# Altium PCB УШЯИ.411618.029Э.pcbdoc (part 4 of 6)
Units mil, origin at the board's own origin, x right, y up, seen from the top; angles counter-clockwise.
Board outline 13385.8 x 6692.9 mil, 4 copper layers (Top Layer, Supply, GND, Bottom Layer), stack 62.3 mil thick; 637 components, 474 nets, 1978 pads, 458 vias.
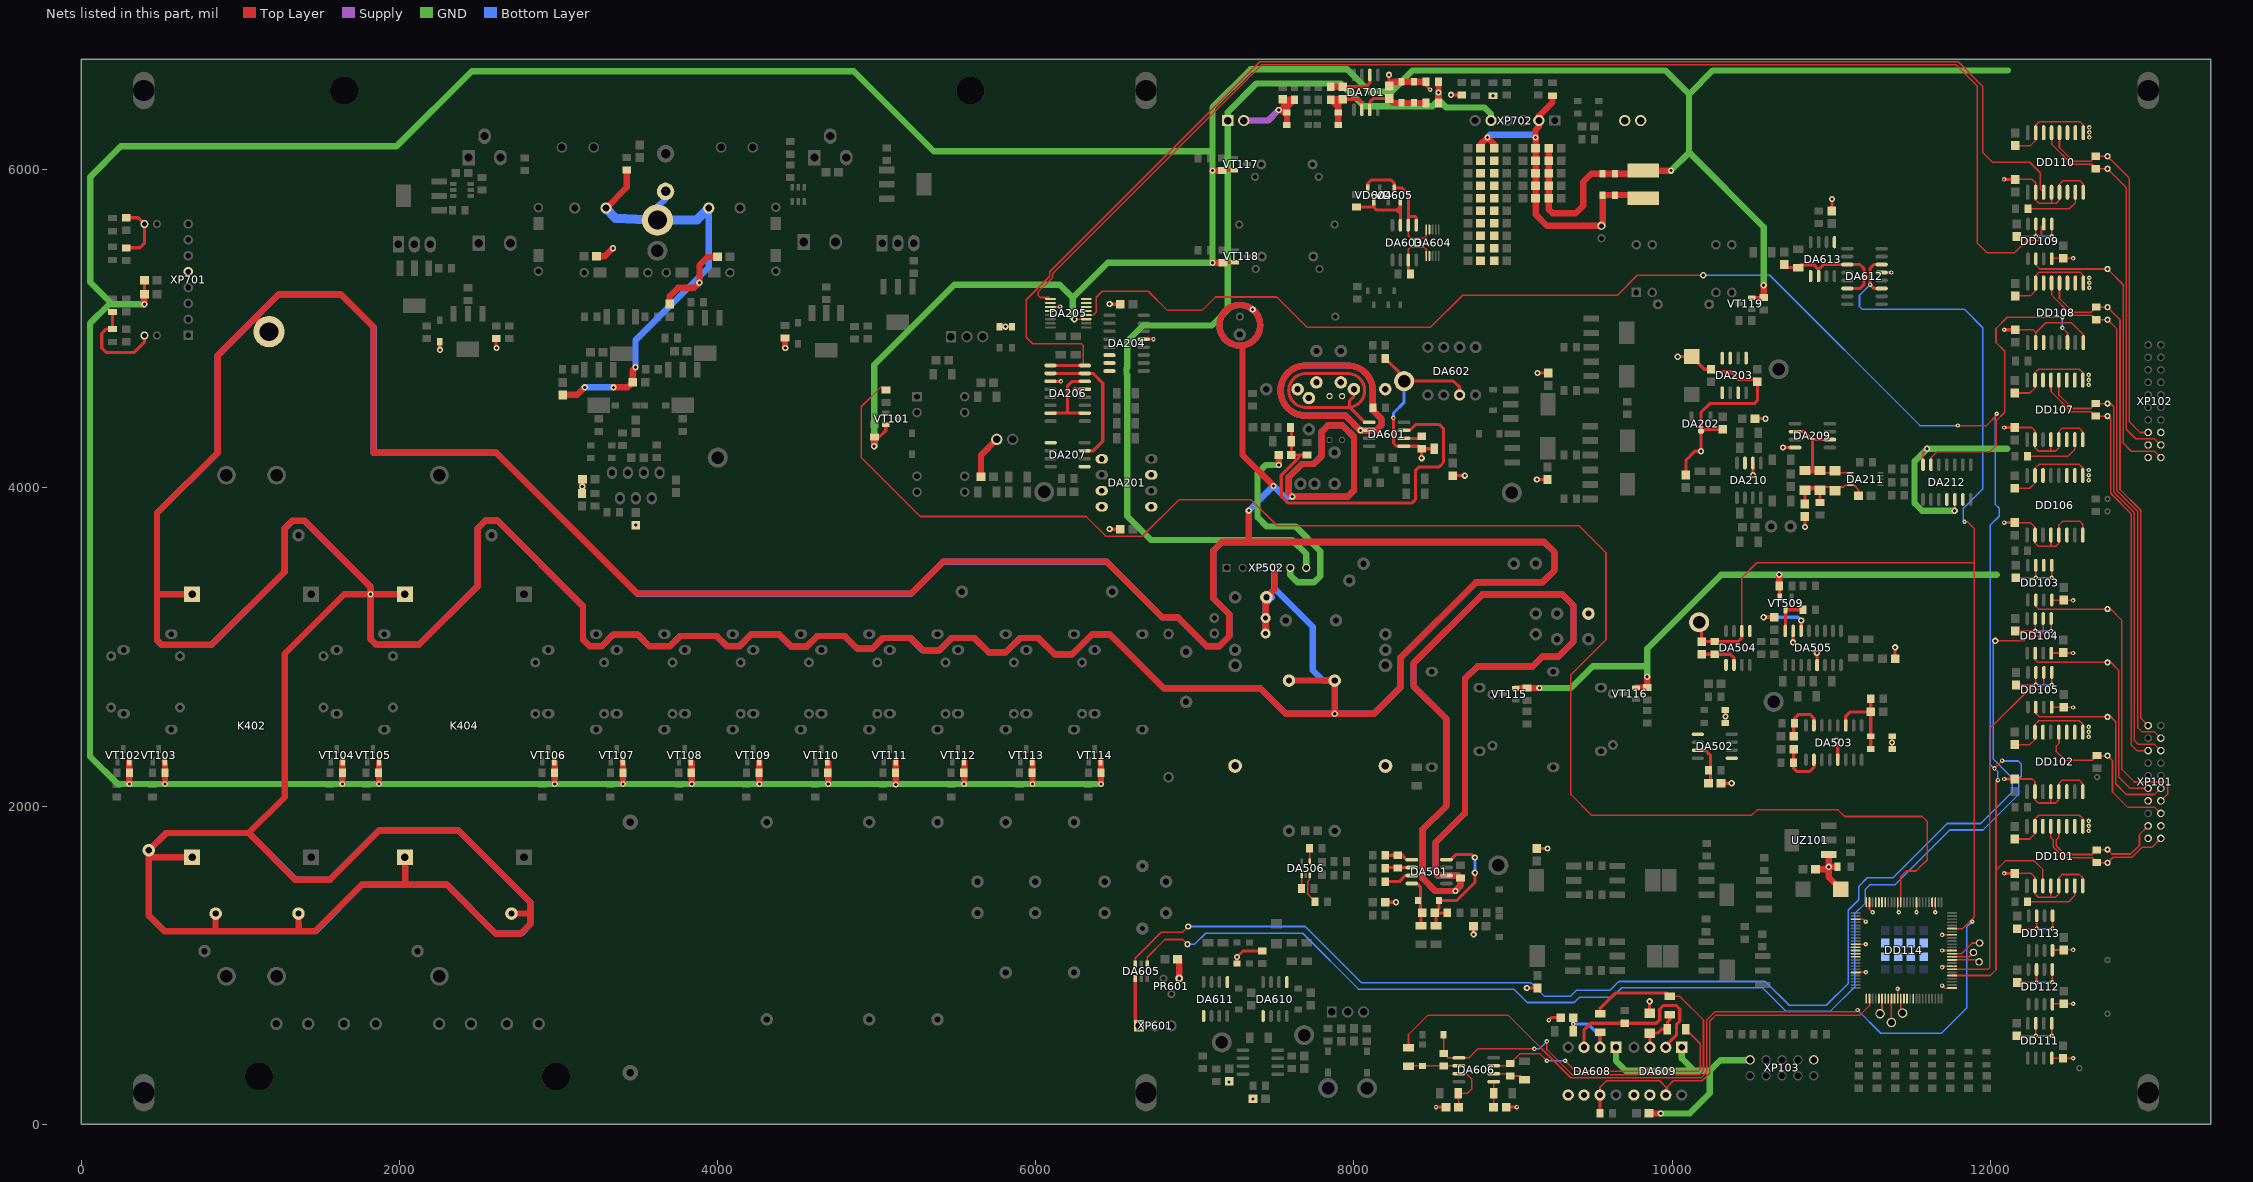
[diagram p6: the nets of this part, all layers, seen from the top]

## Via types
v1: diameter 27.6, hole 11.8, Top Layer to Bottom Layer, 218 vias
v2: diameter 39.4, hole 19.7, Top Layer to Bottom Layer, 213 vias
v3: diameter 27.6, hole 12, Top Layer to Bottom Layer, 24 vias
v4: diameter 78.7, hole 39.4, Top Layer to Bottom Layer, 3 vias

## Nets (pads, with @x,y where several pads share a name; then routed paths per layer and width w, separated by ;. In a path a pad name is that pad's centre, name@x,y a point inside that pad or via, vN(x,y) a via of type N, cw(c..) or ccw(c..) an arc to the next point about the centre after c; other vN are vias at no path point) (continued)
CLK1_DAC_P: DD102.12 pad.6@12736.2,2316.4 R103.1 XP101.6 | length 1084.7
  Top Layer w10: DD102.12@12431.1,2464 12431.1,2393.4 12415.2,2377.5 12415.2,2342 12470.2,2286.9 12640.7,2286.9 R103.1@12670.2,2316.4 ; R103.1@12670.3,2316.5 pad.6@12736.3,2316.5 ; pad.6@12736.2,2316.5 12767.7,2285 12767.7,2088.1 12862.2,1993.6 13031.5,1993.6 XP101.6@13070.8,1954.2
CLK_ADC_N: DD107.13 pad.13 R107.2 XP101.15 | length 2760.3
  Top Layer w10: DD107.13@12380.7,4676.7 12380.7,4606 12508,4478.7 12633,4478.7 R107.2@12661.5,4450.3 ; R107.2@12641.8,4450.3 R107.2@12661.5,4450.3 ; pad.13@12736.2,4450.3 12755.9,4430.6 12755.9,3966.1 12885.8,3836.1 12885.8,2383.4 12921.2,2348 XP101.15@12992.1,2347.9 ; pad.13@12736.3,4450.3 R107.2@12661.5,4450.3
CLK_ADC_P: DD107.12 pad.12 R107.1 XP101.16 | length 2837.8
  Top Layer w10: DD107.12@12430.7,4676.7 12430.7,4583.6 12515.8,4498.4 12630.3,4498.4 12661.5,4529 pad.12@12736.2,4529 12756,4529 ; pad.12@12755.9,4529 12775.6,4509.3 12775.6,3973.9 12905.5,3844 12905.5,2410.9 12929.1,2387.3 13031.5,2387.3 XP101.16@13070.9,2347.9
D: DA205.4 DA605.4 DD101.3 DD114.30 | length 18023.3
  Top Layer w10: DA205.4@6317.5,5085.4 6359.8,5085.4 6379.9,5105.5 6379.9,5198.4 6417.3,5235.8 6706.7,5235.8 6825.2,5117.3 7047.6,5117.3 7129.5,5199.2 7514.6,5199.2 7704.7,5009 8481.1,5009 8683.1,5211 9656.3,5211 9781.1,5335.8 v2(10195.6,5335.8) ; DA605.4@6700,1006.8 6700,1049.2 6811.8,1161 6924,1161 v2(6953.9,1131.1) ; DD114.30@11759.9,934.6 12000,934.6 12035.5,970 12035.5,1596 ; v1(11794.8,4391.4) 11975.6,4391.4 12039.7,4455.5 v1(12039.7,4465.8) ; v1(12025.7,2236.5) 12073.6,2284.5 v1(12073.6,2285.4) ; v1(12047.2,2162.6) 12035.5,2150.8 12035.5,1596 ; DD101.3@12330.2,1498.5 12330.2,1600.5 12275.7,1655 12094.5,1655 12035.5,1596
  Bottom Layer w10: v2(6953.9,1131.1) 6998.4,1131.1 7068.1,1200.8 7677.5,1200.8 8028.7,849.6 9004.3,849.6 9088.6,765.4 9383.8,765.4 9416.9,798.4 9623.2,798.4 9682.7,857.9 10567.3,857.9 10714.1,711.1 10995.3,711.1 11147.4,863.2 11147.4,1323.9 11214.4,1390.9 11214.4,1477.4 11241.4,1504.3 11399.6,1504.3 11744.5,1849.2 11953.9,1849.2 12177.1,2072.4 12177.1,2170.9 12194.1,2187.8 12194.1,2263.8 12174.8,2283.1 12076,2283.1 v1(12073.6,2285.4) ; v2(10195.6,5335.8) 10613,5335.8 11557.4,4391.4 v1(11794.8,4391.4) ; v1(12039.7,4465.8) 12031.5,4457.5 12031.5,3894.5 12055.1,3870.9 12055.1,3822 11999.4,3766.4 11999.4,2261 12023.9,2236.5 v1(12025.7,2236.5) 12047.2,2215 v1(12047.2,2162.6)
DA: DA212.6 DD108.6 | length 1887.5
  Top Layer w10: DA212.6@11626.5,4144.8 11626.5,4188.3 11664.7,4226.5 11997,4226.5 12035.4,4265 12035.4,4420.3 12090.9,4475.8 12090.9,4858.1 12035.4,4913.6 12035.4,5001.6 12106.1,5072.3 v1@12453.6,5072.3 ; v1@12452.4,5005 12484.5,4972.9 DD108.6@12484.5,4912.9
  Bottom Layer w10: v1(12452.3,5005) 12452.3,5071.2 v1(12453.5,5072.3)
DA201_1: DA201.1
DA201_3: DA201.3
DA201_5: DA201.5
DA201_7: DA201.7
DA201_8: DA201.8
DA203_1: DA203.1
DA203_3: DA203.3
DA203_5: DA203.5
DA203_7: DA203.7
DA203_8: DA203.8
DA204_14: DA204.14
DA204_15: DA204.15
DA204_16: DA204.16
DA205_5: DA205.5
DA205_6: DA205.6
DA205_7: DA205.7
DA205_8: DA205.8
DA205_10: DA205.10
DA205_12: DA205.12
DA206_10: DA206.7 DA206.10 DA207.3 | length 856.8
  Top Layer w19.7: DA206.10@6093.2,4719.3 DA206.7@6308.6,4719.3 ; DA207.3@6307.5,4233.4 6362.2,4233.4 6421.3,4292.6 6421.3,4657.4 6359.4,4719.3 DA206.7@6308.7,4719.3
DA206_15: DA206.2 DA206.6 DA206.15 | length 507.8
  Top Layer w19.7: DA206.15@6093.2,4469.3 6198.8,4469.3 ; DA206.2@6308.6,4469.3 6198.8,4469.3 ; DA206.6@6308.7,4669.3 6228.7,4669.3 6198.8,4639.3 6198.8,4469.3
DA207_1: DA207.1
DA207_5: DA207.5
DA210_7: DA210.7
DA211_1: C218.1 C219.1 C220.1 DA209.2 DA209.6 DA211.1 | length 811.2
  Top Layer w10: C218.1@10834.8,4109.4 10848.1,4096 C220.1@11004,4096 ; C220.1@11023.7,4107.5 11023.7,4094.8 DA211.1@11120.1,4094.8
  Top Layer w19.7: DA209.2@10772.8,4353.3 10831.9,4353.3 10881.9,4303.3 ; C218.1@10834.8,4109.4 10881.9,4109.4 ; C219.1@10929.2,4109.4 10881.9,4109.4 ; DA209.6@10991.1,4303.3 10881.9,4303.3 ; 10881.9,4109.4 10881.9,4303.3
DA212_11: DA212.11
DA212_13: DA212.13
DA501_1: DA501.1 P503.1 P504.1 | length 177.8
  Top Layer w19.7: P503.1@8196.9,1690.5 8275.6,1690.5 8303.2,1690.5 8330.5,1663.1 DA501.1@8363.3,1663.1
DA501_2: DA501.2 P501.1 P504.2 | length 171.7
  Top Layer w19.7: P501.1@8196.9,1607.8 8196.9,1613.1 DA501.2@8363.3,1613.1
DA501_3: DA501.3 P502.1 | length 182.1
  Top Layer w19.7: P502.1@8196.9,1525.1 8283.5,1525.1 8321.5,1563.1 DA501.3@8363.3,1563.1
DA501_4: C509.1 DA501.4 R510.2 VD503.2 | length 322.1
  Top Layer w19.7: DA501.4@8363.3,1513.1 8397.9,1513.1 8417.4,1493.6 8417.4,1328.3 8429.2,1328.3 8421.3,1320.4 R510.2@8421.3,1248.7
DA501_8: C509.2 DA501.8 R509.1 R511.2 VD503.1 | length 879.1
  Top Layer w19.7: R509.1@8515.8,1248.7 8515.8,1320.4 C509.2@8507.9,1328.3 ; DA501.8@8581.6,1663.1 8608.5,1663.1 8640.2,1694.8 8741.8,1694.8 v2@8759.9,1676.7 ; R511.2@8586.7,1328.3 C509.2@8507.9,1328.3 ; v2@8759.9,1581 8759.9,1519.6 8647.3,1407 8535.2,1407 8535.2,1355.5 C509.2@8507.9,1328.3
  Bottom Layer w19.7: v2(8759.8,1581) v2(8759.8,1676.7)
DA502_1: DA502.1
DA502_3: C513.1 DA502.3 R519.2 | length 273.4
  Top Layer w19.7: DA502.3@10161.2,2350.5 10209.8,2350.5 10240.2,2320.1 10240.2,2155 C513.1@10228.4,2143.2
DA502_5: DA502.5
DA503_2: C515.2 DA503.2 R521.1 | length 312.8
  Top Layer w19.7: C515.2@10763.8,2355.8 10763.8,2273.2 10763.8,2237.4 10783.5,2217.7 10866.2,2217.7 10890.8,2242.3 DA503.2@10890.8,2291.4
DA503_11: C514.2 DA503.11 R520.1 VD508.1 VD509.2 | length 541.2
  Top Layer w19.7: DA503.11@11090.8,2506.8 11090.8,2564.4 11118.4,2592 C514.2@11248.1,2592 ; VD509.2@11248.1,2359.8 11248.1,2438.5 C514.2@11248.1,2592 ; R520.1@11248.1,2674.7 C514.2@11248.1,2592
DA503_15: C516.2 DA503.15 R522.1 | length 300.8
  Top Layer w19.7: C516.2@10763.8,2438.5 10763.8,2517.3 R522.1@10767.7,2521.2 10767.7,2548.4 10795.3,2576 10866.2,2576 10890.8,2551.4 DA503.15@10890.8,2506.8
DA504_1: DA504.1
DA504_2: C518.2 DA504.2 R528.2 | length 257.2
  Top Layer w19.7: C518.2@10185.1,2954.2 R528.2@10267.7,2954.2 10365.9,2954.2 10388.4,2931.7 DA504.2@10388.4,2887.1
DA504_5: DA504.5
DA505_14: C519.2 DA505.14 | length 376.7
  Top Layer w19.7: v2(10574.8,3186.2) C519.2@10641.8,3186.5 ; DA505.14@10810.9,3101.3 v2@10811.1,3166.6
  Bottom Layer w19.7: v2(10574.8,3186.2) 10791.3,3186.2 v2(10811,3166.5)
DA505_16: DA505.16 R531.2 VT509.3 | length 243.5
  Top Layer w19.7: DA505.16@10710.9,3101.3 10712.6,3103.1 VT509.3@10712.6,3233.8 R531.2@10822.9,3233.8
DA506_1: DA506.1 P506.1 | length 84.7
  Top Layer w10: P506.1@7669.3,1481.8 7671.3,1481.8 DA506.1@7671.3,1564.5
DA506_3: DA506.3 P505.1 | length 190.6
  Top Layer w10: DA506.3@7722.5,1564.5 7722.5,1538.9 7708.7,1525.1 7708.7,1446.4 P505.1@7755.9,1399.1
DA506_4: DA506.4 P507.2 | length 68.9
  Top Layer w10: DA506.4@7722.5,1651.1 7722.5,1718 P507.2@7724.5,1718
DA601_1: DA601.1 DA602.3 KT601.1 R608.2 R609.2 R614.2 | length 1351.8
  Top Layer w19.7: R608.2@8196.9,4812.5 8315,4694.4 8315,4670.8 8626,4670.8 8664.2,4632.6 DA602.3@8664.2,4583.8 ; v1(8248.1,4439.8) 8248.1,4281.4 8267.5,4262 DA601.1@8313.9,4261.1 8409.7,4261.1 R609.2@8425.2,4245.6 ; v2(8425.2,4186.5) R609.2@8425.2,4245.6 ; R614.2@8504.8,4245.6 R609.2@8425.2,4245.6
  Bottom Layer w19.7: v1(8248.1,4439.8) 8248.1,4470 8315,4536.9 KT601.1@8315,4670.8
DA601_2: DA601.2 R609.1 | length 116.7
  Top Layer w19.7: DA601.2@8313.9,4311.1 8412.1,4311.2 R609.1@8425.2,4324.3
DA601_3: C603.1 DA601.3 R602.2 R603.2 R604.2 | length 2316.5
  Top Layer w19.7: R603.2@7602.4,4379.4 7606.3,4375.5 C603.1@7606.3,4206.2 7653.6,4206.2 ; R602.2@7704.8,4206.2 7653.6,4206.2 ; DA601.3@8313.9,4361.1 8351.8,4361.1 8389.8,4399.1 8535.5,4399.1 8563,4371.6 8563,4159 8535.5,4131.4 8409.5,4131.4 8385.9,4107.8 8385.9,3925.6 8364.2,3903.9 7587.4,3903.9 7543.3,3948 7543.3,4079.7 7653.6,4189.7 7653.6,4206.2
DA601_5: C601.1 C602.1 C604.1 C605.1 C606.2 DA601.5 R605.2 R606.2 | length 1440.5
  Top Layer w19.7: 8000,4576.3 7972.5,4548.7 7972.5,4506 7972.5,4505.4 8066.8,4411.1 DA601.5@8095.6,4411.1 ; 7696.8,4505.4 cw(c7696.8,4611.7) 7696.8,4718 7960.9,4718 cw(c7960.9,4611.7) 7972.38,4506.02 cw(c7960.9,4611.7) 7960.9,4505.4 7696.8,4505.4
DA603_1: DA603.1 DA603.2 DA604.10 VD604.3 VD605.1 | length 880.9
  Top Layer w10: DA603.2@8342,5650 8342,5582.8 8356.4,5568.4 8440.3,5568.4 8454.8,5582.9 DA604.10@8454.8,5624.5
  Top Layer w19.7: VD604.3@8086.7,5884.7 8086.7,5912.9 8108.3,5934.5 8234.3,5934.5 8254,5914.9 8254,5884.7 8303.8,5884.7 8342,5846.5 8342,5699.3 ; DA603.2@8342,5650 8342,5699.3 ; DA603.1@8392,5650 8392,5698.1 8383.9,5706.2 8348.9,5706.2 8342,5699.3
DA603_3: DA603.3 R620.2 VD604.1 VD605.3 | length 526.3
  Top Layer w19.7: R620.2@8016,5764.2 8124.1,5765.2 ; VD604.1@8124.1,5795.3 8124.1,5765.2 ; 8269.8,5745.5 8291.4,5767.2 VD605.3@8291.4,5795.3 ; VD605.3@8291.4,5795.4 DA603.3@8292,5650 ; 8291.6,5725.5 8289.7,5725.5 8269.7,5745.5 8143.8,5745.5 8124.1,5765.2
DA603_7: DA603.7 DA604.1 R622.2 | length 327.3
  Top Layer w10: DA603.7@8342,5431.7 8342,5498.9 8356.4,5513.3 8440.3,5513.3 8454.8,5498.8 DA604.1@8454.8,5457.2
  Top Layer w19.7: DA603.7@8342,5431.7 8342,5358.3 R622.2@8356.4,5344
DA604_2: DA604.2
DA604_9: DA604.9
DA605_1: DA605.1 XP601.1 | length 307.6
  Top Layer w19.7: DA605.1@6625.2,916.3 6625.2,643.4 XP601.1@6649.8,618.9
DA606_1: DA606.1 R628.2 R632.1 R633.1 VD609.2 | length 3043.7
  Top Layer w10: VD609.2@8563.8,563.1 8564.1,562.8 R628.2@8564.1,445 8591.5,417.6 DA606.1@8659.6,417.6 8723.5,417.6 8779.7,473.8 v1(9134.1,473.8) ; v1(9212.6,520.9) 9212.6,469.7 9370.1,312.2 10173.2,312.2 10196.8,335.8 10196.8,654.7 10046.5,805.1 R633.1@9984.5,805.1
  Top Layer w19.7: R632.1@9547.5,694.8 9547.5,729.8 9641.7,824 9965.5,824 R633.1@9984.5,805.1
  Bottom Layer w10: v1(9134.1,473.8) 9165.6,473.8 v1(9212.6,520.9)
DA606_2: DA606.2 R623.2 R628.1 VD608.2 | length 318.6
  Top Layer w10: R623.2@8342.5,364.2 8345.9,367.6 DA606.2@8659.7,367.6
DA606_3: C611.2 DA606.3 R624.2 | length 338.6
  Top Layer w10: C611.2@8657.5,107.5 8656.7,194.1 8712.6,194.1 8740.2,221.7 8740.2,284.6 8707.2,317.6 DA606.3@8659.7,317.6
DA606_5: C612.2 DA606.5 R626.2 | length 160.1
  Top Layer w10: C612.2@8878,107.5 DA606.5@8878,267.6
DA606_6: DA606.6 R625.2 R627.1 | length 209.3
  Top Layer w10: DA606.6@8878,317.6 8967,317.6 R627.1@8981.4,303.2 9049.2,303.2 R625.2@9072,280.5
DA606_7: DA606.7 R627.2 R634.1 | length 1677.9
  Top Layer w10: DA606.7@8878,367.6 8981.4,367.6 R627.2@8981.4,382 9041.5,442.1 9169.3,442.1 v1(9212.6,398.8) ; v1(9326.8,398.8) 9393.7,331.9 10161.4,331.9 10177.1,347.6 10177.1,506.1 R634.1@10086,597.2
  Bottom Layer w10: v1(9212.6,398.8) v1(9326.8,398.8)
DA608_2: C614.2 DA608.2 R631.2 R632.2 | length 452.4
  Top Layer w19.7: R631.2@9377.1,583.9 C614.2@9378,670.5 ; DA608.2@9546.3,483.5 9547.5,484.6 R632.2@9547.5,578.4
  Bottom Layer w19.7: v1@9378,631.1 9468.5,631.1 9546.3,553.3 DA608.2@9546.3,483.5
  other v1: 9377.9,631.1
DA608_3: DA608.3 DA609.2 R637.1 | length 1099.6
  Top Layer w19.7: DA608.3@9446.3,483.5 9446.3,593.1 9488.2,635 R637.1@9701,635 ; R637.1@9701,635.1 9900.3,635.1 9921.5,656.3 9921.5,723.3 9945.1,746.9 10023.8,746.9 10047.5,723.2 10047.5,648.5 10027.8,628.8 10027.8,561.8 9959.7,493.7 DA609.2@9959.7,483.5
DA608_5: DA608.5
DA608_6: DA608.6
DA609_3: C618.2 DA609.3 R633.2 R634.2 | length 308.1
  Top Layer w19.7: C618.2@9858.5,572.4 C618.2@9858.6,572.3 ; DA609.3@9859.7,483.5 9859.7,571.2 C618.2@9858.6,572.3 ; R634.2@9969.6,597.2 9933.3,597.2 9908.4,572.4 C618.2@9858.6,572.3 ; R634.2@9969.6,597.3 9969.6,641.4 9984.5,656.3 R633.2@9984.5,688.6
DA609_5: DA609.5
DA609_6: DA609.6
DA610_1: DA610.1
DA610_5: DA610.5
DA611_1: DA611.1
DA611_5: DA611.5
DA612_14: C629.2 DA612.11 DA612.14 DA613.6 R650.1 | length 807.4
  Top Layer w19.7: C629.2@10704.9,5403 10723.7,5384.1 R650.1@10791.5,5384.1 10809.1,5401.7 10889.8,5401.7 10919.9,5371.6 ; DA613.6@10919.9,5330.6 10919.9,5371.5 10951.7,5403.3 11100.9,5403.3 11180.9,5403.3 11204.8,5379.4 11204.8,5277.1 11181,5253.3 DA612.14@11101,5253.3
DA613_1: DA613.1
DA613_5: DA613.5
DA701_2: C738.1 DA701.2 R711.2 VD714.1 VD715.2 | length 568.7
  Top Layer w19.7: 7897.9,6418.6 7897.9,6438.5 ; C738.1@7929.2,6442.4 8031.6,6442.4 8049.9,6424.1 DA701.2@8049.9,6376.6
  Top Layer w39.4: 7901.6,6414.9 7897.9,6418.6 7878,6438.5 R711.2@7854.4,6438.5 ; VD715.2@7901.7,6281 7901.7,6391.3 ; R711.2@7854.4,6438.5 7858.4,6442.4 7929.2,6442.4 7901.7,6414.9 7901.7,6391.3 ; R711.2@7854.4,6438.5 7901.7,6391.3
DA701_3: C737.1 DA701.3 R710.1 VD712.2 VD713.1 | length 421.2
  Top Layer w19.7: DA701.3@8099.9,6376.5 8099.9,6424.2 8122,6446.3 C737.1@8220.6,6446.3
  Top Layer w39.4: C737.1@8220.6,6446.4 8248.1,6418.8 VD713.1@8299.2,6418.8 VD712.2@8377.9,6418.8 R710.1@8452.8,6418.8
DA701_6: C738.2 DA701.6 R712.2 | length 304.6
  Top Layer w19.7: C738.2@7929.2,6521.2 8074.9,6521.2 8099.9,6546.2 DA701.6@8099.9,6594.9
  Top Layer w39.4: R712.2@7854.4,6521.2 C738.2@7929.2,6521.2
DAT1_DAC_N: DD101.13 pad.4@12736.2,1643.2 R101.2 XP101.2 | length 917
  Top Layer w10: DD101.13@12380.3,1872.6 12380.3,1800.3 12394.6,1786 12394.6,1742.7 12461.6,1675.8 12639.9,1675.8 R101.2@12669.4,1646.3 ; R101.2@12669.4,1646.2 12672.3,1643.2 pad.4@12736.3,1643.2 ; pad.4@12736.2,1643.2 12771.6,1678.6 12889.7,1678.6 12952.7,1741.6 13015.7,1741.6 XP101.2@13070.9,1796.8
DAT1_DAC_P: DD101.12 pad.3@12736.2,1725.9 R101.1 XP101.3 | length 866.1
  Top Layer w10: DD101.12@12430.3,1872.6 12430.3,1801.9 12414.3,1786 12414.3,1750.5 12469.4,1695.5 12639.9,1695.5 R101.1@12669.4,1725 ; R101.1@12669.4,1724.9 12670.4,1725.9 pad.3@12736.3,1725.9 ; pad.3@12736.2,1725.9 12763.8,1698.3 12881.9,1698.3 12937,1753.4 12937,1820.4 XP101.3@12992.1,1875.5
DAT_ADC1_N: DD108.13 pad.14@12736.2,5056.6 R109.2 XP101.18 | length 3301.5
  Top Layer w10: DD108.13@12384.6,5283 12384.6,5212.3 12511.9,5085 12636.9,5085 12665.4,5056.6 pad.14@12736.3,5056.6 ; pad.14@12736.2,5056.6 12795.3,4997.5 12795.3,3981.8 12925.2,3851.9 12925.2,2493.6 12952.8,2466 13031.5,2466 XP101.18@13070.9,2426.7
DAT_ADC1_P: DD108.12 pad.14@12736.2,5135.3 R109.1 XP101.19 | length 3178.5
  Top Layer w10: DD108.12@12434.6,5283 12434.6,5189.9 12519.7,5104.7 12634.2,5104.7 12665.4,5135.3 pad.14@12736.3,5135.3 ; pad.14@12736.2,5135.3 12814.9,5056.5 12814.9,3989.7 12944.9,3859.7 12944.9,2552.7 XP101.19@12992.1,2505.4
DD101_6: DD101.6
DD101_7: DD101.7 R102.2 | length 374.9
  Top Layer w10: R102.2@12232.4,1399.2 12492.2,1399.2 12530.2,1437.2 DD101.7@12530.2,1498.6
DD101_10: DD101.10
DD101_11: DD101.11
DD101_14: DD101.14
DD102_6: DD102.6
DD102_10: DD102.10
DD102_11: DD102.11
DD102_14: DD102.14
DD106_6: DD106.6
DD106_10: DD106.10
DD106_11: DD106.11
DD106_14: DD106.14
DD107_6: DD107.6
DD107_7: DD107.7 R108.2 | length 377.7
  Top Layer w10: R108.2@12232.4,4198.3 12488.3,4198.3 12530.6,4240.7 DD107.7@12530.6,4302.6
DD107_10: DD107.10
DD107_11: DD107.11
DD107_14: DD107.14
DD108_3: DD108.3
DD108_10: DD108.10
DD108_11: DD108.11
DD108_14: DD108.14
DD110_6: DD110.6
DD110_7: DD110.7 R112.2 | length 380
  Top Layer w10: R112.2@12236.3,5753.5 12496.1,5753.5 12534.5,5791.9 DD110.7@12534.5,5857.8
DD110_10: DD110.10
DD110_11: DD110.11
DD110_14: DD110.14
DD114_1: DD114.1
DD114_5: DD114.5
DD114_6: DD114.6 pad.20 | length 99.4
  Top Layer w10: pad.20@11307.2,694.4 11319,706.2 DD114.6@11319,788.9
DD114_7: DD114.7
DD114_8: DD114.8
DD114_9: DD114.9 pad.21 | length 149.6
  Top Layer w10: pad.21@11378,639.3 DD114.9@11378,788.9
DD114_10: DD114.10
DD114_12: DD114.12 pad.24 | length 95.5
  Top Layer w10: DD114.12@11437.1,788.9 11437.1,710.2 pad.24@11448.9,698.3
DD114_13: DD114.13
DD114_14: DD114.14
DD114_16: DD114.16
DD114_35: DD114.35 pad.17 | length 174.2
  Top Layer w10: DD114.35@11759.9,1033 11917,1033 pad.17@11929.1,1020.9
DD114_36: DD114.36 pad.16 | length 145.1
  Top Layer w10: DD114.36@11759.9,1052.7 11866.5,1052.7 pad.16@11893.7,1079.9
DD114_37: DD114.37 pad.15 | length 200.8
  Top Layer w10: DD114.37@11759.9,1072.3 11819.1,1072.3 11885.8,1139 pad.15@11933.1,1139
DD114_54: DD114.54
DD114_69: DD114.69
DD114_70: DD114.70
DD114_71: DD114.71
DD114_72: DD114.72
DD114_75: DD114.75
DD114_87: DD114.87
DD114_88: DD114.88
DD114_89: DD114.89
DD114_90: DD114.90
DET: C518.1 DA504.6 DA612.3 DA612.6 DD114.45 KT503.1 R528.1 R623.1 | length 12384.7
  Top Layer w10: R623.1@8342.5,480.7 8342.5,564.2 8464.6,686.2 8968.5,686.2 9362.2,292.5 10181.1,292.5 10216.5,328 10216.5,654.7 10269.5,707.7 11155.4,707.7 v1@11165.4,717.7 ; DA504.6@10438.4,3100.1 10438.4,3435.6 10531.5,3528.7 11897.7,3528.7 ; DD114.45@11759.9,1229.8 11827.1,1229.8 11870.1,1272.8 ; v1(11837.4,3786.6) 11856.3,3786.6 11897.7,3745.3 11897.7,3528.7 ; 11870.1,1272.8 v1(11885.8,1272.8) 11885.8,1288.5 ; 11870.1,1272.8 11885.8,1288.5 ; 11885.8,1288.5 11897.7,1300.4 11897.7,3528.7
  Top Layer w19.7: KT503.1@10169.3,3155 10185.1,3139.3 10185.1,3033 R528.1@10267.7,3033 10413.7,3033 10438.4,3057.7 DA504.6@10438.4,3100.1 ; DA612.3@11316.4,5253.3 11267.9,5253.3 11244.1,5277.1 11244.1,5379.5 11267.9,5403.3 DA612.6@11316.4,5403.3
  Bottom Layer w10: v1@11165.4,717.7 11311,572 11692.9,572 11850.4,729.5 11850.4,1237.4 v1(11885.8,1272.8) ; v1(11244,5276.8) 11177.1,5209.9 11177.1,5139 11194.9,5121.2 11838.2,5121.2 11952.7,5006.7 11952.7,3993.3 11830.6,3871.3 11830.6,3786.6 v1@11837.3,3786.6
  other v1: 11165.3,717.7
DET1: DA608.7 DA609.7 DD114.2 R646.1 | length 2434.6
  Top Layer w10: DA608.7@9546.3,183.5 9546.3,232.5 9586.6,272.8 9921.2,272.8 9959.7,234.4 DA609.7@9959.7,183.5 9969.8,193.6 9969.8,234.7 10007.5,272.5 10188.6,272.5 10236.2,320.1 10236.2,646.8 10275.6,686.2 11181.1,686.2 11240.9,746 11240.9,788.2 DD114.2@11240.2,788.9
  Top Layer w19.7: DA608.7@9546.3,183.5 9546.3,69.3 R646.1@9547.5,68.1
E1: DD103.6
E2: DA605.6 DD104.6 | length 8201.8
  Top Layer w10: DA605.6@6625.2,1006.8 6625.2,1042.9 6789.4,1207.1 6922.4,1207.1 v2(6958.3,1242.9) ; v2(12030.3,3038.2) 12030.7,3037.8 12211.8,3037.8 12241.7,3067.7 12306.7,3067.7 12331.9,3093 DD104.6@12331.9,3178.4
  Bottom Layer w10: v2(6958.3,1242.9) 7694.1,1242.9 8046.5,890.5 9110.3,890.5 9197.2,803.5 9360.2,803.5 9398,841.3 9609,841.3 9664.9,897.2 10585.8,897.2 10735.4,747.6 10968.9,747.6 11105.9,884.6 11105.9,1344.9 11172.4,1411.4 11172.4,1494.5 11226.7,1548.8 11387.8,1548.8 11729.2,1890.2 11939.8,1890.2 12137.6,2088 12137.6,2175.7 12018.9,2294.5 12018.9,3026.8 v2(12030.3,3038.2)
ENB_D1BN: DD103.2 pad.7@12736.2,3237.7 XP101.8 | length 1999.4
  Top Layer w10: DD103.2@12285.9,3295.3 12285.9,3254.8 12303,3237.7 pad.7@12736.2,3237.7 12756,3237.7 ; pad.7@12755.9,3237.7 12826.7,3166.8 12826.7,2229.8 12905.5,2151.1 13094.5,2151.1 13114.2,2131.4 13114.2,2076.3 XP101.8@13070.9,2033
ENB_D2BN: DD104.2 pad.9@12736.2,2903 XP101.9 | length 1479.9
  Top Layer w10: DD104.2@12282,2961.5 12282,2917.7 12296.7,2903.1 12736.2,2903.1 12756,2903.1 ; 12755.9,2903.1 12807.1,2851.9 12807.1,2182.6 12877.9,2111.7 XP101.9@12992.1,2111.7
ENB_RGBN: DD105.2 pad.8 XP101.10 | length 1281.1
  Top Layer w10: DD105.2@12285.9,2622.9 12285.9,2582.7 12308.1,2560.6 12736.2,2560.6 12756,2560.6 ; 12755.9,2560.6 12787.4,2529.1 12787.4,2139.3 12854.3,2072.4 13030.9,2072.4 XP101.10@13070.9,2111.7
ER: DD105.6 DD114.32 | length 2272.8
  Top Layer w10: DD114.32@11759.9,973.9 11984.3,973.9 11996.2,985.7 11996.2,2486.7 12244.2,2734.8 12307.2,2734.8 12335.9,2763.5 DD105.6@12335.9,2839.8
GN: C218.2 C219.2 C220.2 C221.1 C222.2 DA211.5 R228.2 | length 657
  Top Layer w10: C218.2@10834.8,3984 10844.3,3993.6 10856.1,4005.4 11077.4,4005.4 11088.1,4016.1 11120.1,4016.1 11143.8,4016.1 11171.3,3988.5 C221.1@11171.3,3949.1
  Top Layer w19.7: C222.2@10834.8,3899.1 C218.2@10834.8,3984 ; C218.2@10834.8,3993.6 10844.3,3993.6 C219.2@10929.2,3993.6 ; R228.2@10929.2,3907 C219.2@10929.2,3984
GND: C102.1 C104.1 C106.1 C108.1 C110.1 C112.1 C114.1 C116.1 C118.1 C120.1 C122.1 C124.1 C126.1 C127.2 C128.1 C129.1 C130.1 C131.1 C132.1 C133.1 C134.1 C135.1 C136.1 C622.1 C703.1 C704.1 C706.1 C707.1 C708.1 C709.1 C710.1 DA205.3 DA212.7 DA212.12 DA608.1 DA609.1 DD101.2 DD101.4 DD101.5 DD101.8 DD102.2 DD102.4 DD102.5 DD102.8 DD103.5 DD103.7 DD104.5 DD104.7 DD105.5 DD105.7 DD106.2 DD106.4 DD106.5 DD106.8 DD107.2 DD107.4 DD107.5 DD107.8 DD108.2 DD108.8 DD109.5 DD109.7 DD110.2 DD110.4 DD110.5 DD110.8 DD111.5 DD111.7 DD112.5 DD112.7 DD113.5 DD113.7 DD114.11 DD114.26 DD114.33 DD114.38 DD114.43 DD114.53 DD114.59 DD114.65 DD114.74 DD114.78 DD114.86 DD114.95 L1.1 R127.1 R129.1 R131.1 R133.1 R135.1 R137.1 R139.1 R141.1 R143.1 R145.1 R147.1 R149.1 R151.1 R153.1 R155.1 R157.1 R159.1 R161.1 R163.1 R533.1 UZ101.1 VD101.2 VD710.1 VD711.2 VT101.2 VT102.2 VT103.2 VT104.2 VT105.2 VT106.2 VT107.2 VT108.2 VT109.2 VT110.2 VT111.2 VT112.2 VT113.2 VT114.2 VT115.2 VT116.2 VT117.2 VT118.2 VT119.2 VT509.2 XP103.2 XP103.10 | length 48640.7
  Top Layer w10: v2(6242.7,5059.8) DA205.3@6317.5,5059.8 ; DD114.95@11153.6,954.2 11216.6,954.2 v1@11216.6,954.3 ; DD114.86@11153.6,1131.4 v1@11216.6,1131.4 ; DD114.78@11153.6,1288.9 11200.8,1288.9 v1@11216.6,1273.1 ; DD114.74@11240.2,1395.2 11240.2,1351.9 v1@11259.9,1332.2 ; DD114.11@11417.4,788.9 v1@11417.4,851.9 ; DD114.65@11417.4,1395.2 11417.4,1340.1 v1@11425.3,1332.2 ; v1@11535.5,1332.2 DD114.59@11535.5,1395.2 ; DA212.7@11574.8,4146.8 11574.8,4217.7 v2(11602.3,4245.3) ; v1@11653.6,1332.2 DD114.53@11653.6,1395.2 ; v1@11696.9,871.6 11712.7,855.8 DD114.26@11759.9,855.8 ; v1@11696.9,985.8 11704.8,993.6 DD114.33@11759.9,993.6 ; v1@11696.9,1092 DD114.38@11759.9,1092 ; v1@11696.9,1190.5 DD114.43@11759.9,1190.5 ; v2(11775.6,3855.5) DA212.12@11775.6,3930.3 ; C102.1@12153.6,1576.3 12256,1576.3 12280.2,1552.1 12280.2,1498.6 12280.2,1448 12300.6,1427.5 12380.2,1427.5 ; C104.1@12153.6,2169.8 12263.9,2169.8 12280.2,2153.5 DD102.2@12280.2,2090.1 12280.2,2039.5 12300.6,2019 12410.4,2019 12430.2,2039.1 DD102.5@12430.2,2090.1 12430.2,2141.2 12450,2161.2 12559.8,2161.2 12580.3,2140.7 DD102.8@12580.3,2090.1 ; C112.1@12153.6,3781 12252,3781 12280.7,3752.4 12280.7,3703.3 12280.7,3652.7 12301.1,3632.2 12380.7,3632.2 ; C114.1@12153.6,4379.4 12259.9,4379.4 12280.6,4358.8 12280.6,4302.6 12280.6,4252 12301,4231.5 12380.6,4231.5 ; C108.1@12156.9,3100.8 v1@12281.9,3100.8 ; C116.1@12157.5,4993.6 12267.8,4993.6 12284.5,4976.9 12284.5,4974.9 ; C120.1@12157.5,5938.5 12263.9,5938.5 12284.5,5917.8 DD110.2@12284.5,5857.8 ; C110.1@12160.9,2761.4 12285.8,2761.4 12285.8,2783.1 ; C106.1@12160.9,3435.1 12285.9,3435.1 DD103.7@12285.9,3513.6 ; C122.1@12165.2,556.5 12285.9,556.5 DD111.7@12285.9,634.1 ; C118.1@12165.4,5580.2 12286.1,5580.2 DD109.7@12286.1,5657.9 ; C124.1@12169.1,891.1 12289.8,891.1 DD112.7@12289.8,968.7 ; C126.1@12170,1229.2 12290.7,1229.2 DD113.7@12290.7,1306.8 ; v1@12281.9,3100 v1@12281.9,3100.8 ; 12281.9,3128.4 12281.9,3126.3 ; DD104.7@12281.9,3178.5 12281.9,3126.3 ; v1(12282,3100.7) 12281.9,3126.3 ; v1@12282,3100.8 v1@12281.9,3100.8 ; DD110.2@12283.6,5859.8 12283.6,5809.2 12303.9,5788.7 12386,5788.7 ; DD108.2@12284.5,4912.9 12284.5,4974.9 ; v1@12285.9,2761.4 DD105.7@12285.9,2839.9 ; DD101.4@12380.2,1498.6 12380.2,1427.5 ; DD102.4@12380.2,2090.1 12380.3,2024.2 ; DD107.4@12380.6,4302.6 12380.6,4231.5 ; DD106.4@12380.7,3703.3 12380.7,3632.2 ; v1@12381.9,3100 DD104.5@12381.9,3178.5 ; DD110.4@12384.5,5857.8 12384.5,5790.1 12386,5788.7 ; v1@12385.9,556.7 DD111.5@12385.9,634.1 ; v1@12385.9,2761.4 DD105.5@12385.9,2839.9 ; v1@12385.9,3434.6 DD103.5@12385.9,3513.6 ; v1@12386.1,5580.5 DD109.5@12386.1,5657.9 ; v1@12389.8,891.3 DD112.5@12389.8,968.7 ; v1@12390.7,1229.4 DD113.5@12390.7,1306.8 ; DD110.5@12433.6,5859.8 12433.6,5808.8 12413.7,5788.7 12386,5788.7 ; DD110.5@12434.5,5857.8 12434.5,5908.8 12454.3,5928.9 12564.1,5928.9 12584.5,5908.4 DD110.8@12584.5,5857.8 ; DD101.8@12580.2,1498.6 12580.2,1549.2 12559.8,1569.7 12450,1569.7 12430.2,1549.6 12430.2,1498.6 12430.2,1447.6 12410.4,1427.5 12380.2,1427.5 ; DD107.8@12580.6,4302.6 12580.6,4353.2 12560.2,4373.7 12450.4,4373.7 12430.6,4353.6 12430.6,4302.6 12430.6,4251.6 12410.8,4231.5 12380.6,4231.5 ; DD106.8@12580.7,3703.3 12580.7,3771.3 12563.1,3788.9 12452.8,3788.9 12430.7,3766.7 12430.7,3703.3 12430.7,3652.3 12410.9,3632.2 12380.7,3632.2 ; DD108.8@12584.5,4912.9 12584.5,4963.5 12509.9,5038.1 12347.7,5038.1 12284.5,4974.9 ; v1@12281.9,3100.8 12281.9,3126.3
  Top Layer w19.7: C704.1@397.5,5217.2 C703.1@397.5,5303.8 ; R127.1@4986.3,4320.4 5017.8,4320.4 5057.1,4359.8 VT101.2@5057.1,4397.2 ; R159.1@7173.2,5993.6 7173.2,5995.6 VT117.2@7248.1,5995.6 ; R161.1@7177.2,5414.9 7179.1,5416.9 VT118.2@7252,5416.9 ; VT119.2@10500.4,5195 10502.4,5197 R163.1@10574.4,5197 ; R533.1@10673.3,3383.4 10675.2,3383.4 VT509.2@10675.2,3312.5 ; v1@12086.7,1576.3 C102.1@12153.6,1576.3 ; v1@12086.7,2169.8 C104.1@12153.6,2169.8 ; v1@12086.7,3781 C112.1@12153.6,3781 ; v1@12086.7,4379.4 C114.1@12153.6,4379.4 ; v1@12086.7,4993.6 C116.1@12157.5,4993.6 ; v1@12086.7,5938.5 C120.1@12157.5,5938.5
  Top Layer w39.4: VT102.2@303.1,2279.4 303.2,2279.3 303.2,2209.8 v2(303.2,2138.9) ; v2(397.2,5154) 397.5,5154.3 C704.1@397.5,5217.2 ; VT103.2@525.6,2279.4 527.6,2277.4 R131.1@527.6,2209.8 v2(527.6,2138.9) ; v2(1641.8,2138.9) 1641.8,2209.8 1641.8,2277.5 VT104.2@1643.7,2279.4 ; VT105.2@1872.1,2279.4 1872.9,2278.5 v2(1872.9,2139) ; VT106.2@2974,2279.4 2976.4,2277 R137.1@2976.4,2209.8 v2(2976.4,2138.9) ; VT107.2@3403.2,2279.4 3405.5,2277.1 R139.1@3405.5,2209.8 v2(3405.5,2138.9) ; VT108.2@3832.3,2279.4 3837.5,2274.2 v2(3837.5,2139) ; VT109.2@4261.4,2279.4 4262.7,2278.1 v2(4262.7,2139) ; VT110.2@4690.6,2279.4 4695.8,2274.2 v2(4695.8,2139) ; v2(4984.2,4261) 4986.2,4263 R127.1@4986.2,4320.5 ; v2(5119.7,2135.9) VT111.2@5119.7,2279.4 ; VT112.2@5548.8,2279.4 5550.1,2278.1 v2(5550.1,2139) ; VT113.2@5978,2279.4 5979.2,2278.1 v2(5979.2,2139) ; VT114.2@6407.1,2279.4 6409.5,2277 6409.5,2209.8 v2(6409.5,2138.9) ; v2(7110.2,5414.6) 7176.9,5414.6 R161.1@7177.2,5414.9 ; v2(7110.2,5993.3) 7172.9,5993.3 R159.1@7173.2,5993.6 ; VT115.2@9016.9,2739.3 9018.8,2741.3 R155.1@9087.7,2741.3 ; R155.1@9094.5,2741.3 v2(9165.3,2741.3) ; C706.1@9224.4,5820.4 9224.4,5749.5 9248.1,5725.9 9393.7,5725.9 9441,5773.2 9441,5922.8 9492.2,5973.9 VD710.1@9563,5973.9 VD711.2@9641.7,5973.9 L1.1@9818.9,5973.9 ; C706.1@9224.5,5820.4 9224.5,5899.1 9224.5,5977.8 9224.5,6056.6 C710.1@9224.5,6135.3 ; VT116.2@9772.8,2743.2 9774.7,2745.2 R157.1@9843.6,2745.2 ; L1.1@9818.9,5993.6 9991.8,5993.6 v2(9992.1,5993.3) ; R157.1@9842.5,2753.1 v2(9842.5,2812.2) ; C622.1@9858.2,68.1 v2(9928.5,68.1) ; R163.1@10574.8,5196.9 v2(10574.8,5272.8) ; R533.1@10673.3,3387.1 v2(10673.3,3454.3) ; C128.1@10900.4,1602.9 10969.6,1602.9 v2@10984.6,1617.9 ; UZ101.1@10984.6,1695.2 v2@10984.6,1617.9 ; VD101.2@11039.7,1617.9 v2@10984.6,1617.9 ; C127.2@11060,1477.9 10984.6,1553.3 v2@10984.6,1617.9
  GND w39.4: 185,5162.6 185,5163.9 56.9,5292 56.9,5953.4 249.8,6146.3 1982.1,6146.3 2454.6,6618.8 4856.1,6618.8 5360.1,6114.8 7109.2,6114.8 7110.2,6113.8 ; v2(397.2,5154) 176.5,5154 55.1,5032.7 55.1,2312.2 228.4,2138.9 v2(303.2,2138.9) v2(527.6,2138.9) v2(1641.8,2138.9) 1872.9,2138.9 v2(2976.4,2138.9) v2(3405.5,2138.9) 3837.5,2138.9 4262.7,2138.9 4695.8,2138.9 5550.1,2138.9 5979.2,2138.9 v2(6409.5,2138.9) ; v2(4984.2,4261) 4984.2,4772.8 5488.2,5276.8 6149.6,5276.8 6232.3,5194.1 ; v2(6242.7,5059.8) 6232.3,5070.3 6232.3,5194.1 ; v2(9165.3,2741.3) 9362.2,2741.3 9500,2879.1 9842.5,2879.1 ; DA608.1@9646.3,483.5 9646.3,398.2 9708.6,335.8 10137.8,335.8 ; v2(9842.5,2812.2) 9842.5,2879.1 ; v2(9928.5,68.1) 10110.2,68.1 10236.2,194.1 10236.2,335.8 ; v2(9992.1,5993.3) 10106.3,6107.5 ; DA609.1@10059.7,483.5 10059.7,413.9 10137.8,335.8 ; XP103.2@10490,404.8 10488.2,403 10303.4,403 10236.2,335.8 ; v2(10574.8,5272.8) 10574.8,5639 10106.3,6107.5 ; v2(11775.6,3855.5) 11570.8,3855.5 11523.6,3902.7 11523.6,4166.5 v2(11602.3,4245.3) 12106.3,4245.3 ; 12039.3,3454.3 v2(10673.3,3454.3) 10307.4,3454.3 9842.5,2989.4 9842.5,2879.1 ; 12110.2,6623.2 10255.9,6623.2 10106.3,6473.6 ; 6232.3,5194.1 6452.7,5414.6 v2(7110.2,5414.6) v2(7110.2,5993.3) 7110.2,6113.8 ; 7110.2,6113.8 7110.2,6390.9 7350.4,6631.1 7956.7,6631.1 8098.4,6489.4 8236.2,6489.4 8370.1,6623.2 9956.7,6623.2 10106.3,6473.6 ; 10106.3,6107.5 10106.3,6473.6 ; 10137.8,335.8 10236.2,335.8
  Bottom Layer w10: v1@12281.9,3099.9 v1(12381.9,3099.9) ; v1(12285.8,556.4) v1(12385.8,556.6) ; v1@12285.8,2761.3 v1(12385.8,2761.3) ; v1(12285.8,3434.5) v1(12385.8,3434.5) ; v1(12286,5580.3) v1(12386,5580.5) ; v1@12289.7,891 v1@12389.7,891.2 ; v1(12290.6,1229.2) v1(12390.6,1229.4)
  other v1: 11417.3,851.9 11696.8,871.6 12289.8,891 12389.8,891.2 11216.5,954.2 11696.8,985.7 11696.8,1092 11216.5,1131.4 11696.8,1190.5 11216.5,1273.1 11259.8,1332.2 11425.2,1332.2 11535.4,1332.2 11653.5,1332.2 12086.6,1576.3 12086.6,2169.8 12285.9,2761.3 12086.6,3781 12086.6,4379.4 12086.6,4993.6 12086.6,5938.5
  other v2: 10984.5,1617.9
GNDA: C201.2 C202.2 C203.2 C204.2 C205.2 C206.1 C209.1 C214.2 C215.2 C222.1 C301.1 C303.1 C304.1 C307.1 C308.2 C311.2 C315.2 C316.2 C317.1 C318.2 C503.2 C506.2 C508.2 C510.2 C511.1 C513.2 C517.1 C603.2 C606.1 C607.2 C609.2 C610.1 C611.1 C612.1 C613.2 C614.1 C615.2 C616.2 C618.1 C628.2 C701.2 C702.1 C711.1 C712.1 C713.1 C714.1 C715.1 C716.2 C717.1 C718.1 C719.1 C720.1 C721.1 C722.1 C723.1 C724.1 C725.1 C726.1 C727.1 C728.1 C729.1 C730.1 C731.1 C732.1 C733.1 C734.1 C735.1 C736.1 C737.2 C739.1 DA202.2 DA204.5 DA205.11 DA206.5 DA206.11 DA209.4 DA210.6 DA503.5 DA505.5 DA505.15 DA612.5 FV501.2 FV502.2 L1.2 pad.25 PR601.1 R312.1 R317.1 R325.2 R643.2 R703.1 R704.1 R707.1 R709.2 R713.1 VD201.1 VD202.2 VD305.1 VD310.2 VD506.2 VD507.1 VD508.2 VD509.1 VD611.2 VD701.2 VD702.2 VD705.2 VD706.2 VD710.2 VD711.1 VD712.1 VD713.2 VD716.2 VD717.1 XP202.2 XP501.1 XP501.2 XP502.5 XP503.2 XP701.5 XP702.2 | length 14326.3
  Top Layer w10: DA205.11@6091.9,5136.6 6153.6,5136.6 v1@6153.6,5139
  Top Layer w19.7: VD702.2@196.7,5105 VD701.2@196.7,4998.7 159,4998.7 130,4969.7 130,4879.1 157.5,4851.6 334.7,4851.6 397.5,4914.4 C701.2@397.5,4957.4 ; R703.1@283.3,5508.5 369.6,5508.5 397.5,5536.5 397.5,5658.2 358.1,5697.5 R704.1@283.3,5697.5 ; VD305.1@2254.1,4918.8 2254.1,4869.2 v2@2256,4867.3 ; R312.1@2608.4,4938.5 2608.4,4881 v2@2610.3,4879.2 ; VD202.2@5771.7,5013 5810.1,5013 VD201.1@5850.4,5013 ; DA206.11@6093.3,4669.3 v1@6157.6,4669.1 ; v1@6244.3,4617.9 6244.3,4619.3 DA206.5@6308.7,4619.3 ; v2@6464.6,3741.4 6466,3740 C201.2@6531.5,3740 ; v2(6464.6,5154.7) 6466,5153.4 C206.1@6531.5,5153.4 ; DA204.5@6678.6,4934.3 v1@6740.2,4934.3 ; VD611.2@7264.6,1010.1 v2(7264.6,1051.1) 7302.4,1088.9 R643.2@7424,1088.9 ; C739.1@7551.2,6442.4 7551.2,6398.8 7543.6,6391.3 ; C739.1@7551.3,6435.5 C739.1@7551.3,6442.4 ; 7578.7,6391.3 7543.6,6391.3 ; 7578.7,6408 7578.8,6412.3 7578.8,6414.9 7579.1,6438.5 7579.1,6442.4 ; 7578.8,6324 7527.6,6375.2 7543.6,6391.3 ; R713.1@7622.1,6442.4 R713.1@7626.1,6438.5 ; C503.2@8196.9,1395.2 v2(8263.8,1395.2) ; C737.2@8220.5,6525.1 v2(8220.5,6595.7) ; R709.2@8452.7,6552.6 8452.7,6528.8 v1(8478.9,6502.6) ; v1(8515.7,107.5) C611.1@8578.7,107.5 ; v2@8610.3,6469.7 R707.1@8677.2,6470 ; C610.1@8622.1,4076.3 v2@8696.9,4076.3 ; C511.1@8752,1245.6 8752,1193.6 v2(8752.3,1193.3) ; C612.1@8956.7,107.5 v1(9023.6,107.5) ; v2@9086.7,855.8 C510.2@9153.6,855.8 ; C508.2@9149.6,1733.8 v2@9216.6,1733.5 ; v2(9149.6,4052.7) C607.2@9216.6,4052.7 ; v2@9153.6,4722 C609.2@9220.5,4722 ; v1(9225.3,654.7) 9241,670.5 C614.1@9299.2,670.5 ; C618.1@9858.5,697.8 v2@9858.5,772.6 ; v2@10035.5,4824 10036.6,4825.2 10122.1,4825.2 10201.7,4745.6 C204.2@10244.1,4745.6 10244.1,4729.9 10366.2,4729.9 10413.5,4682.6 10535.6,4682.6 10535.6,4548.8 10515.8,4529.1 10236.2,4529.1 10181.1,4474 DA202.2@10181.1,4341.8 ; C215.2@10086.6,4080.2 10086.6,4174.4 10141.7,4229.5 v2(10181.1,4229.5) DA202.2@10181.1,4341.8 ; C513.2@10307.1,2143.2 v2(10374,2142.9) ; C202.2@10318.8,4367.6 10207,4367.6 DA202.2@10181.1,4341.8 ; VD507.1@10334.7,2521.2 10334.7,2562 VD506.2@10334.7,2603.9 ; DA210.6@10507.3,4155.9 v2(10507.9,4079.9) ; C214.2@10519.7,4434.6 v2@10586.6,4434.3 ; v2@10696.9,4253.2 DA209.4@10772.8,4253.3 ; v2@10759.9,3028.8 DA505.15@10760.9,3101.3 ; v2@10834.7,3753.2 C222.1@10834.7,3820.4 ; v2@10909.5,2961.8 10910.9,2961.8 DA505.5@10910.9,2885.9 ; C628.2@11004,5740.3 v2@11004,5815.1 ; v2(11031.5,2409.9) 11040.8,2400.6 DA503.5@11040.8,2291.4 ; DA612.5@11316.4,5353.3 v1@11378,5353.3 ; VD509.1@11381.9,2359.8 v2(11381.9,2398.8) VD508.2@11381.9,2438.5 ; C517.1@11401.6,2926.7 v2@11401.6,2997.3
  Top Layer w27.6: v2@7527.6,6375.2 VD717.1@7578.8,6375.2
  Top Layer w39.4: C308.2@3025.8,4584.2 3118.2,4584.2 v2(3165.4,4631.4) ; C301.1@3148.2,3963.8 3151.8,3967.4 C304.1@3151.8,4053.2 ; C315.2@3240.2,5455 3292.2,5455 v2@3342.6,5505.4 ; C316.2@3299.3,5758.2 3429.2,5888.1 R325.2@3429.2,5997.6 ; v2(3346.5,4631.4) 3435.2,4631.4 3466.7,4662.9 3466.7,4739.8 v2@3484.3,4757.4 ; C307.1@3698.3,5154.4 3698.3,5203.7 3752,5257.4 3854.4,5257.4 3885.9,5288.9 3885.9,5399.1 3937.8,5451.1 C318.2@4000.1,5451.1 ; R317.1@4424,4941.1 4424,4880.7 v2(4425.2,4879.4) ; C209.1@5655.6,4068.5 5655.6,4205.1 XP202.2@5755.2,4304.7 ; C613.2@6895.5,1036.2 6901.4,1030.3 PR601.1@6901.4,916.1 ; v2@7527.6,4143.2 C603.2@7527.6,4206.2 ; C739.1@7551.3,6442.4 C739.1@7555.2,6438.5 ; VD716.2@7578.8,6281 7578.8,6324 7578.8,6359.8 7578.8,6375.2 7578.8,6391.3 ; C737.2@8220.6,6525.1 8248.1,6552.7 8299.3,6552.7 8377.9,6552.7 R709.2@8452.7,6552.7 ; C736.1@8795.4,6135.3 8795.4,6159 v2@8834.6,6198.3 ; v2@8838.7,6202.3 8882,6159 C717.1@8882,6135.3 ; v2@9141.7,6202.2 9141.7,6249.5 9161.8,6269.6 XP702.2@9161.8,6308.6 ; v2@9141.8,6202.3 9141.8,6135.3 9141.8,6056.6 9141.8,5977.8 9141.8,5899.1 9141.8,5820.4 9141.8,5718 9212.6,5647.2 9555.2,5647.2 9563,5647.2 9563,5840.1 9641.7,5840.1 9818.9,5840.1 L1.2@9818.9,5820.4 ; XP702.2@9161.9,6308.6 9161.9,6336.5 9248.1,6422.7 VD705.2@9248.1,6464.1 ; C739.1@7555.2,6438.5 7578.8,6414.9 ; C739.1@7555.2,6438.5 7579.1,6438.5 7602.5,6438.5 ; 7578.8,6391.3 7626.1,6438.5 7602.5,6438.5 ; 7578.8,6391.3 7578.8,6412.3 7578.8,6414.9 ; 7578.8,6414.9 7602.5,6438.5
  Supply w39.4: XP503.2@7307.5,6308.7 7461,6308.7 v2(7527.5,6375.2)
  GND w39.4: v2(7527.5,4143.2) 7446.3,4143.2 7394.1,4090.9 7394.1,3813.8 7451.2,3756.7 7633.1,3756.7 7788.2,3601.5 7788.2,3445.3 7748.8,3405.9 7645.3,3405.9 7599.7,3451.5 7599.7,3497 XP502.5@7599.9,3497.1
  Bottom Layer w39.4: v2(3165.4,4631.4) v2@3346.4,4631.4 ; v2(3484.2,4757.4) 3484.2,4926.7 3944.8,5387.3 C317.1@3944.8,5758.1 ; pad.25@3622,5682.6 3622,5765.3 3673.2,5816.5 VD310.2@3673.2,5886.5 ; v2(8838.6,6202.3) 8855.2,6218.9 9125.1,6218.9 v2(9141.7,6202.3)
  Bottom Layer w59.1: C316.2@3299.2,5758.2 3358.9,5693.5 pad.25@3622,5682.6 3871.9,5684.2 3944.8,5758.1 C317.1@3944.9,5758.2
  other v1: 6244.1,4617.9 6157.5,4669.1 6740.1,4934.2 6153.5,5139 11377.9,5353.2
  other v2: 7364.5,159 7214.9,266.6 9858.5,772.5 9086.6,855.8 9216.5,1733.5 10334.6,2562 10909.4,2961.8 11401.6,2997.2 10759.8,3028.7 6464.6,3741.3 10834.6,3753.1 3486.3,3765.3 3149.6,4007.9 8696.8,4076.3 10696.8,4253.1 10586.6,4434.2 9153.5,4721.9 10035.4,4824 2255.9,4867.3 2610.2,4879.1 5810,5013 3885.8,5288.9 3342.5,5505.4 11003.9,5815.1 8874,6464.1 8610.2,6469.7
GNDN: C101.1 C103.1 C105.1 C107.1 C109.1 C111.1 C113.1 C115.1 C117.1 C119.1 C121.1 C123.1 C125.1 DD101.9 DD101.15 DD102.9 DD102.15 DD103.4 DD104.4 DD105.4 DD106.9 DD106.15 DD107.9 DD107.15 DD108.9 DD108.15 DD109.4 DD110.9 DD110.15 DD111.4 DD112.4 DD113.4 XP101.1 XP101.4 XP101.7 XP102.1 XP102.3 XP102.6 | length 4548.1
  Top Layer w10: C101.1@12153.6,1792.8 12248.1,1792.8 12280.2,1825 DD101.15@12280.2,1872.6 12280.2,1919.5 12303.2,1942.5 12559.1,1942.5 12580.2,1921.4 DD101.9@12580.2,1872.6 ; C103.1@12153.6,2386.3 12248.1,2386.3 12280.2,2418.5 12280.2,2513 12303.2,2536 12559.1,2536 12580.2,2514.9 DD102.9@12580.2,2466.1 ; C111.1@12153.6,3997.5 12248.1,3997.5 12280.2,4029.7 12280.2,4124.1 12303.2,4147.1 12559.1,4147.1 12580.2,4126.1 DD106.9@12580.2,4077.2 ; C113.1@12153.6,4596 12248.1,4596 12280.2,4628.1 12280.2,4722.6 12303.2,4745.6 12559.1,4745.6 12580.2,4724.5 DD107.9@12580.2,4675.7 ; C115.1@12157.5,5206.2 12252.1,5206.2 12284.2,5238.3 12284.2,5332.8 12307.2,5355.8 12563.1,5355.8 12584.2,5334.7 DD108.9@12584.2,5285.9 ; C119.1@12157.5,6151.1 12252,6151.1 12284.2,6183.2 DD110.15@12284.2,6230.8 ; DD110.15@12284.5,6231.8 12284.5,6278.7 12307.5,6301.7 12563.4,6301.7 12584.5,6280.6 DD110.9@12584.5,6231.8 ; DD104.4@12382,2960.2 12384,2962.1 v1@12519.8,2962.1 ; DD111.4@12385.9,415.8 12386.8,414.9 v1@12519.8,414.9 ; DD105.4@12385.9,2621.6 12387.9,2619.6 v1@12519.8,2619.6 ; DD103.4@12386,3295.2 12388.3,3292.8 v1@12519.8,3292.8 ; DD109.4@12386.1,5439.6 12389,5442.4 C117.1@12456.7,5442.4 v1@12519.8,5442.4 ; DD112.4@12389.8,754.4 12392.9,757.4 v1@12519.8,757.4 ; DD113.4@12390.7,1092.5 12393.5,1095.4 12461.4,1095.4 12462,1096 v1@12519.8,1096
  other v1: 12519.7,414.9 12519.7,757.4 12519.7,1096 12618.1,1844 12618.1,1875.5 12618.1,1907 12618.1,2434.5 12618.1,2466 12618.1,2497.5 12519.7,2619.6 12519.7,2962.1 12519.7,3292.8 12618.1,4048.7 12618.1,4080.2 12618.1,4111.7 12618.1,4647.1 12618.1,4678.6 12618.1,4710.1 12622,5257.4 12622,5288.9 12622,5320.4 12519.7,5442.4 12622,6202.3 12622,6233.8 12622,6265.3
GNDS: R709.1 R710.2 XP502.6 XP503.1 XP702.5 | length 6434.3
  Top Layer w39.4: R710.2@8531.6,6418.8 8531.6,6484.5 R709.1@8531.6,6552.7
  GND w39.4: XP502.6@7699.9,3497.1 7699.9,3584.7 7613,3671.6 6724.8,3671.6 6574.8,3821.7 6574.8,4710.1 6569.8,4715.1 6569.8,4751.8 6574.8,4756.8 6574.8,4921 6673.2,5019.5 7106.3,5019.5 7205.9,5119.1 7205.9,6360.2 7387,6541.3 7917.3,6541.3 7917.3,6540.5 8060.4,6397.4 8492.1,6397.4 8531.5,6436.8 8531.5,6438.2 ; v2(8531.5,6484.5) 8531.5,6438.2 ; XP702.5@8861.8,6308.6 8861.8,6348 8818.9,6390.9 8578.7,6390.9 8531.5,6438.2
GRD: C504.2 K402.7 K402.9 K402.11 K402.12 K404.7 K404.9 K404.11 pad.1@1181.1,4981.5 R506.2 R507.1 VD501.2 VD502.1 XP502.4 | length 74015
  Top Layer w39.4: v4(425.2,1721.6) 533.4,1829.9 1051.3,1829.9 ; K402.7@696.9,1678.3 425.2,1678.3 425.2,1312.2 523.6,1213.8 844.1,1213.8 ; K402.9@696.9,3331.9 476.4,3331.9 ; K402.12@845.9,1324 844.1,1322.2 844.1,1213.8 ; 858.3,4221.6 476.4,3839.7 476.4,3331.9 ; 858.3,4221.7 859.1,4222.5 859.1,4833.5 1094.8,5069.2 ; pad.1@1181.1,4981.5 1094.8,5067.8 1094.8,5069.2 ; K402.11@1366.2,1324 1367.1,1213.8 ; v2@1819,3331.2 1819,3048.4 1819.1,3048.3 ; 1851.7,3015.7 1819.1,3048.3 ; K404.7@2035.5,1678.3 2037.3,1676.5 2037.3,1505.1 ; K404.9@2035.5,3331.9 1819,3331.3 v2(1818.9,3331.3) ; 2610.2,4221.8 2585,4221.8 2584.2,4221 1838.2,4221 1838.2,5010 1631.2,5216.9 1242.5,5216.9 1094.8,5069.2 ; 2610.3,4221.6 3496.1,3335.8 5216.5,3335.8 5417.4,3536.6 6444.9,3536.6 6795.3,3186.2 6893.7,3186.2 7074.8,3005.1 7153.5,3005.1 7216.5,3068.1 7216.5,3206 7115.3,3307.2 7115.3,3604.6 7170.8,3660.2 7340.1,3660.2 ; K404.11@2704.8,1324 2822.9,1324.2 ; 7295.3,4890.9 7298.8,4887.4 7298.8,4207.1 v2(7494.1,4011.8) ; v2(7339.4,3856.7) 7339.4,3660.9 7340.1,3660.2 ; VD501.2@7444.9,3083.9 VD502.1@7444.9,3182.3 7444.9,3307.1 C504.2@7449.93,3312.1 7499.9,3362.1 XP502.4@7499.9,3497.1 ; 7570.7,2579.8 7411,2739.6 6805,2739.6 6464.8,3079.8 6354.6,3079.8 6228.6,2953.9 6118.4,2953.9 6016.1,3056.2 5901.8,3056.2 5811.3,2965.7 5705,2965.7 5614.5,3056.2 5472.7,3056.2 5394,2977.5 5291.6,2977.5 5212.8,3056.2 5039.6,3056.2 4972.7,2989.3 4878.1,2989.3 4799.4,3068 4626.2,3068 4559.3,3001.1 4464.7,3001.1 4386,3079.8 4212.8,3079.8 4138,3005 4059.3,3005 3996.3,3068 3764,3068 3701,3005 3571.1,3005 3500.2,3075.9 3342.7,3075.9 3271.9,3005 3197.1,3005 3153.8,3048.3 3153.8,3257 2618.3,3792.4 2539.6,3792.4 2492.4,3745.2 2492.4,3383 2122.3,3012.9 1854.6,3012.9 1819.1,3048.3 ; 7582.3,2579.8 v2(7879.5,2579.8) 8125.9,2579.8 8291.4,2745.3 8291.4,2930.3 8767.7,3406.6 9184.9,3406.6 9261,3482.6 9261,3595.7 9196.5,3660.2 7340.1,3660.2 ; R506.2@7591.6,2788.5 R507.1@7879,2788.5 v2@7879,2579.9 ; 476.4,3331.9 476.4,3044.5 507.9,3013 818.9,3013 1279.6,3473.7 1279.6,3745.3 1326.8,3792.5 1405.5,3792.5 1818.9,3379.1 v2(1818.9,3331.3) ; 844.1,1213.8 1367.1,1213.8 ; 1367.1,1213.8 1472.5,1213.8 1763.8,1505.1 2037.3,1505.1 ; v2(1818.9,3331.3) 1653,3331.3 1279.5,2957.9 1279.5,2056.2 1051.3,1827.9 1055.2,1827.9 1346.5,1536.6 1563,1536.6 1874,1847.6 2370.2,1847.6 2822.9,1394.9 2822.9,1324.2 ; 2037.3,1505.1 2299.2,1505.1 2606.3,1198 2763.8,1198 2822.9,1257.1 2822.9,1324.2 ; 7154.9,5021.6 7155.3,5011.6 7156.5,5001.6 7158.5,4991.8 7161.2,4982.1 7164.7,4972.7 7168.8,4963.6 7173.8,4954.8 7179.3,4946.5 7185.5,4938.6 7192.3,4931.3 7199.7,4924.4 7207.6,4918.2 7215.9,4912.7 7224.7,4907.8 7233.8,4903.6 7243.2,4900.1 7252.8,4897.4 7262.7,4895.4 7272.6,4894.2 7282.7,4893.8 7292.7,4894.2 7302.6,4895.4 7312.5,4897.4 7322.1,4900.1 7331.5,4903.6 7340.7,4907.8 7349.4,4912.7 7357.7,4918.2 7365.6,4924.4 7373,4931.3 7379.8,4938.6 7386,4946.5 7391.6,4954.8 7396.5,4963.6 7400.7,4972.7 7404.1,4982.1 7406.9,4991.8 7408.8,5001.6 7410,5011.6 7410.4,5021.6 7410,5031.6 7408.8,5041.6 7406.9,5051.4 7404.1,5061 7400.7,5070.5 7396.5,5079.6 7391.6,5088.3 7386,5096.7 7379.8,5104.5 7373,5111.9 7365.6,5118.7 7357.7,5124.9 7349.4,5130.5 7340.7,5135.4 7331.5,5139.6 7322.1,5143.1 7312.5,5145.8 7302.6,5147.7 7292.7,5148.9 7282.7,5149.3 7272.6,5148.9 7262.7,5147.7 7252.8,5145.8 7243.2,5143.1 7233.8,5139.6 7224.7,5135.4 7215.9,5130.5 7207.6,5124.9 7199.7,5118.7 7192.3,5111.9 7185.5,5104.5 7179.3,5096.7 7173.8,5088.3 7168.8,5079.6 7164.7,5070.5 7161.2,5061 7158.5,5051.4 7156.5,5041.6 7155.3,5031.6 7154.9,5021.6 ; 7589.6,3966.9 7589.6,4066.8 7672,4149.2 7746,4149.2 7797.1,4200.2 7797.1,4353 7838.2,4394.1 7926.2,4394.1 8000.8,4319.5 8000.8,3984.2 7961,3944.5 7612,3944.5 7589.6,3966.9
  Bottom Layer w39.4: 425.9,1678.7 425.9,1312.6 524.3,1214.2 1473.2,1214.2 1764.5,1505.5 2299.9,1505.5 2607,1198.4 2764.5,1198.4 2823.6,1257.5 2823.6,1395.3 2370.9,1848 1874.7,1848 1563.8,1537 1347.2,1537 1055.9,1828.3 ; v4@425.9,1722 534.2,1830.3 1055.9,1830.3 ; 1818.9,3048.4 1819,3048.3 1851.6,3015.7 ; 1818.9,3048.5 v2(1818.9,3331.3) 1818.9,3378.3 1405.5,3791.7 1326.8,3791.7 1279.6,3744.5 1279.6,3472.9 818.9,3012.2 507.9,3012.2 476.4,3043.7 476.4,3838.9 858.3,4220.8 858.3,4831.9 1242.9,5216.5 1631.1,5216.5 1839,5008.7 1839,4220.9 2610.2,4220.9 ; 1819,3048.4 1854.5,3013 2122.2,3013 2492.3,3383.1 2492.3,3745.3 2539.5,3792.5 2618.2,3792.5 3153.7,3257.1 3153.7,3048.4 3197,3005.1 3271.8,3005.1 3342.6,3076 3500.1,3076 3571,3005.1 3700.9,3005.1 3763.9,3068.1 3996.2,3068.1 4059.2,3005.1 4137.9,3005.1 4212.7,3079.9 4385.9,3079.9 4464.6,3001.2 4559.2,3001.2 4626.1,3068.1 4799.3,3068.1 4878,2989.4 4972.6,2989.4 5039.5,3056.3 5212.7,3056.3 5291.5,2977.6 5393.9,2977.6 5472.6,3056.3 5614.4,3056.3 5704.9,2965.8 5811.2,2965.8 5901.7,3056.3 6016,3056.3 6118.3,2954 6228.5,2954 6354.5,3079.9 6464.7,3079.9 6804.9,2739.6 7410.8,2739.6 7570.5,2579.9 ; 2610.3,4220.8 3496.1,3335 5216.5,3335 5417.4,3535.8 6444.9,3535.8 6795.3,3185.4 6893.7,3185.4 7074.8,3004.3 7153.5,3004.3 7216.4,3067.2 7216.4,3068 ; v2(7339.4,3856.7) 7339.4,3857.1 v2(7494.1,4011.8) 7561.4,3944.5 v2@7611.3,3944.5 ; VD501.2@7444.9,3083.9 VD502.1@7444.9,3182.3 7444.9,3272.9 C504.2@7484.2,3312.2 ; C504.2@7467.1,3329.3 7499.8,3362.1 XP502.4@7499.8,3497.2 ; XP502.4@7499.9,3497.2 7499.9,3367.7 7741.3,3126.4 7741.3,2854.5 ; 7582.2,2579.8 v2(7879.5,2579.8) ; 7741.3,2854.1 7807.3,2788.6 ; 7807.3,2788.5 R507.1@7879,2788.5 ; v2@7879.6,2579.9 8125.8,2579.7 8291.3,2745.2 8291.3,2930.2 8767.6,3406.5 9184.9,3406.5 9260.9,3482.5 ; 7216.4,3068 7216.4,3206 ; 7216.4,3068 7216.5,3068.1 7216.5,3205.9 7216.4,3206 ; 7216.4,3206 7115.3,3307.2 7115.3,3604.5 7169.3,3658.7 9196.4,3658.7 9261,3594.1 ; v2@7611.3,3944.5 v2(7612.1,3944.5) 7960.3,3944.5 8000.1,3984.2 8000.1,4319.5 7925.5,4394.1 7837.5,4394.1 7796.4,4353 7796.4,4200.2 7745.3,4149.2 7671.3,4149.2 7588.9,4066.8 7588.9,3966.9 v2@7611.3,3944.5 ; 9260.9,3482.5 9261,3482.6 9261,3540.8 9261,3594.1 ; 9260.9,3482.5 9260.9,3540.8 9261,3594.1 ; 7154.9,5021.6 7155.3,5011.6 7156.5,5001.6 7158.5,4991.8 7161.2,4982.1 7164.7,4972.7 7168.8,4963.6 7173.8,4954.8 7179.3,4946.5 7185.5,4938.6 7192.3,4931.3 7199.7,4924.4 7207.6,4918.2 7215.9,4912.7 7224.7,4907.8 7233.8,4903.6 7243.2,4900.1 7252.8,4897.4 7262.7,4895.4 7272.6,4894.2 7282.7,4893.8 7292.7,4894.2 7302.6,4895.4 7312.5,4897.4 7322.1,4900.1 7331.5,4903.6 7340.7,4907.8 7349.4,4912.7 7357.7,4918.2 7365.6,4924.4 7373,4931.3 7379.8,4938.6 7386,4946.5 7391.6,4954.8 7396.5,4963.6 7400.7,4972.7 7404.1,4982.1 7406.9,4991.8 7408.8,5001.6 7410,5011.6 7410.4,5021.6 7410,5031.6 7408.8,5041.6 7406.9,5051.4 7404.1,5061.1 7400.7,5070.5 7396.5,5079.6 7391.6,5088.3 7386,5096.7 7379.8,5104.5 7373,5111.9 7365.6,5118.7 7357.7,5124.9 7349.4,5130.5 7340.7,5135.4 7331.5,5139.6 7322.1,5143.1 7312.5,5145.8 7302.6,5147.7 7292.7,5148.9 7282.7,5149.3 7272.6,5148.9 7262.7,5147.7 7252.8,5145.8 7243.2,5143.1 7233.8,5139.6 7224.7,5135.4 7215.9,5130.5 7207.6,5124.9 7199.7,5118.7 7192.3,5111.9 7185.5,5104.5 7179.3,5096.7 7173.8,5088.3 7168.8,5079.6 7164.7,5070.5 7161.2,5061.1 7158.5,5051.4 7156.5,5041.6 7155.3,5031.6 7154.9,5021.6
  other v2: 7363.4,5121.2
GRD2: DA501.6 R508.1 | length 11041.8
  Top Layer w39.4: 8374,2754.1 8579.6,2548.6 8579.6,1999.9 8432.9,1853.3 8432.9,1545 8511.9,1466.1 8637.8,1466.1 8669.3,1497.6 R508.1@8669.3,1548.7 8654.9,1563.1 DA501.6@8581.6,1563.1 8525,1563.1 8511.9,1576.3 8511.9,1768.9 8697.3,1954.3 8697.3,2799.6 8776.7,2879 9123.2,2879 9182.2,2938.1 9283.2,2938.1 9379.1,3033.7 9379.1,3260.9 9308.2,3331.8 8808.2,3331.8 8374,2897.6 8374,2754.1
  Bottom Layer w39.4: 8374,2754.1 8579.6,2548.6 8579.6,1999.9 8432.9,1853.3 8432.9,1545 8511.9,1466.1 8637.8,1466.1 8669.2,1497.6 8669.2,1548.7 8654.8,1563.1 8525,1563.1 8511.9,1576.3 8511.9,1768.9 8697.3,1954.3 8697.3,2799.6 8776.7,2879 9123.2,2879 9182.2,2938.1 9283.3,2938.1 9379.1,3033.7 9379.1,3260.9 9308.2,3331.8 8808.2,3331.8 8374,2897.6 8374,2754.1
  other v2: 8637.7,1466.1
GRD3: DA601.6 R610.1 | length 3548.6
  Top Layer w39.4: 7683,4454.1 7684.7,4452.5 7948.5,4452.5 v2@8040.5,4360.4 ; 7683.15,4454.08 cw(c7696.6,4611) 7696.6,4768.5 7960.7,4768.5 cw(c7960.7,4611) 8118.2,4611 ; v2(8040.8,4361.1) DA601.6@8095.6,4361.1 8095.7,4361 8139.5,4361 8172.8,4394.3 8172.8,4433.1 8120.5,4485.5 R610.1@8120.5,4504.3 ; R610.1@8118.1,4504.3 8118.1,4611.9
  Bottom Layer w39.4: 7682.9,4454.1 7684.6,4452.4 7948.4,4452.4 v2@8040.4,4360.4 ; 7683.05,4454.08 cw(c7696.5,4611) 7696.5,4768.5 ; 7696.5,4768.4 7960.6,4768.4 ; 7960.6,4768.5 cw(c7960.6,4611) 8118.1,4611 ; v2@8040.7,4361 8095.5,4361 8095.6,4361 8139.5,4361 8172.8,4394.2 8172.8,4433.1 8120.4,4485.4 ; 8118,4485.4 8118,4611.9
IIS: DD114.64 R126.1 | length 10210.7
  Top Layer w10: R126.1@5059.1,4615.4 5043.3,4631.1 5024.8,4631.1 4902.8,4509 4902.8,4190.1 5273.3,3819.7 6316.5,3819.7 6441.3,3694.9 6669.4,3694.9 6900.1,3925.6 7352.7,3925.6 7517.3,3761.1 9414.5,3761.1 9583.8,3591.8 9583.8,3045.2 9363.4,2824.8 9363.4,2072.1 9492,1943.3 10500.4,1943.3 10532.7,1975.6 11042.9,1975.6 11084.3,1934.2 11570.8,1934.2 11602.7,1902.4 11602.7,1663 11531.3,1591.5 11471.2,1591.5 11436.7,1557 DD114.64@11436.7,1395.2
IMPB+/-VN: DD109.2 pad.4@12736.2,5375.5 XP102.2 | length 1910
  Top Layer w10: DD109.2@12286.1,5440.9 12286.1,5400.5 12311.1,5375.5 pad.4@12736.3,5375.5 ; pad.4@12736.2,5375.5 12834.6,5277.1 12834.6,4281 12885.8,4229.8 13031.5,4229.8 XP102.2@13070.9,4190.5
IMPB_N: DD110.13 pad.3@12736.2,6005.4 R111.2 XP102.4 | length 2434.7
  Top Layer w10: DD110.13@12384.6,6231.8 12384.6,6161.1 12511.9,6033.8 12636.9,6033.8 R111.2@12665.4,6005.4 ; R111.2@12661.5,6005.4 R111.2@12665.4,6005.4 ; XP102.4@13070.9,4269.2 13031.5,4308.6 12913.4,4308.6 12854.3,4367.6 12854.3,5887.3 pad.3@12736.2,6005.4 R111.2@12665.4,6005.4
IMPB_P: DD110.12 pad.5@12736.2,6084.1 R111.1 XP102.5 | length 2318.7
  Top Layer w10: DD110.12@12434.6,6231.9 12434.6,6138.8 12519.7,6053.6 12634.2,6053.6 R111.1@12665.4,6084.2 ; R111.1@12661.5,6084.2 R111.1@12665.4,6084.2 ; pad.5@12736.2,6084.1 12874,5946.3 12874,4414.9 12940.9,4347.9 XP102.5@12992.1,4347.9 ; pad.5@12736.3,6084.2 R111.1@12665.4,6084.2
IMPI: DA206.8 DA206.9 DD110.3 | length 8631.5
  Top Layer w10: DA206.8@6308.4,4769.3 6297.6,4780.1 6297.6,4895.1 6287.6,4905.1 5981,4905.1 5940.5,4945.6 5940.5,5181.6 6088.3,5329.3 6088.3,5336.3 6088.5,5336.5 6088.5,5357.4 7408.3,6677.2 11797.7,6677.2 11951.1,6523.8 11951.1,6108.8 12013,6046.8 12247.2,6046.8 12313.6,5980.5 12313.6,5878.6 DD110.3@12334.4,5857.8
  Top Layer w19.7: DA206.9@6093.1,4769.3 DA206.8@6308.4,4769.3
IMPV: DA205.9 DD109.6 | length 8220.3
  Top Layer w10: DA205.9@6091.9,5187.8 6083.6,5196 6028.7,5196 6014.6,5210.2 6014.6,5230.4 6106.1,5321.9 6106.1,5328.9 6106.3,5329.1 6106.3,5347.3 7416.9,6657.9 11786.2,6657.9 11917.8,6526.2 11917.8,5538.4 11977.5,5478.7 12153.1,5478.7 12231.1,5556.7 12264.6,5556.7 12266.4,5554.9 12294.3,5554.9 12296.1,5556.7 12308.6,5556.7 12321.4,5569.5 12321.4,5643.3 DD109.6@12336,5657.9